# Altium PCB Navigation and Locomotion Shield.PcbDoc
Units mil, origin at the board's own origin, x right, y up, seen from the top; angles counter-clockwise.
Board outline 4500 x 2100 mil, 4 copper layers (Top Layer, Ground Plane, Power Plane, Bottom Layer); 38 components, 59 nets, 195 pads, 33 vias.
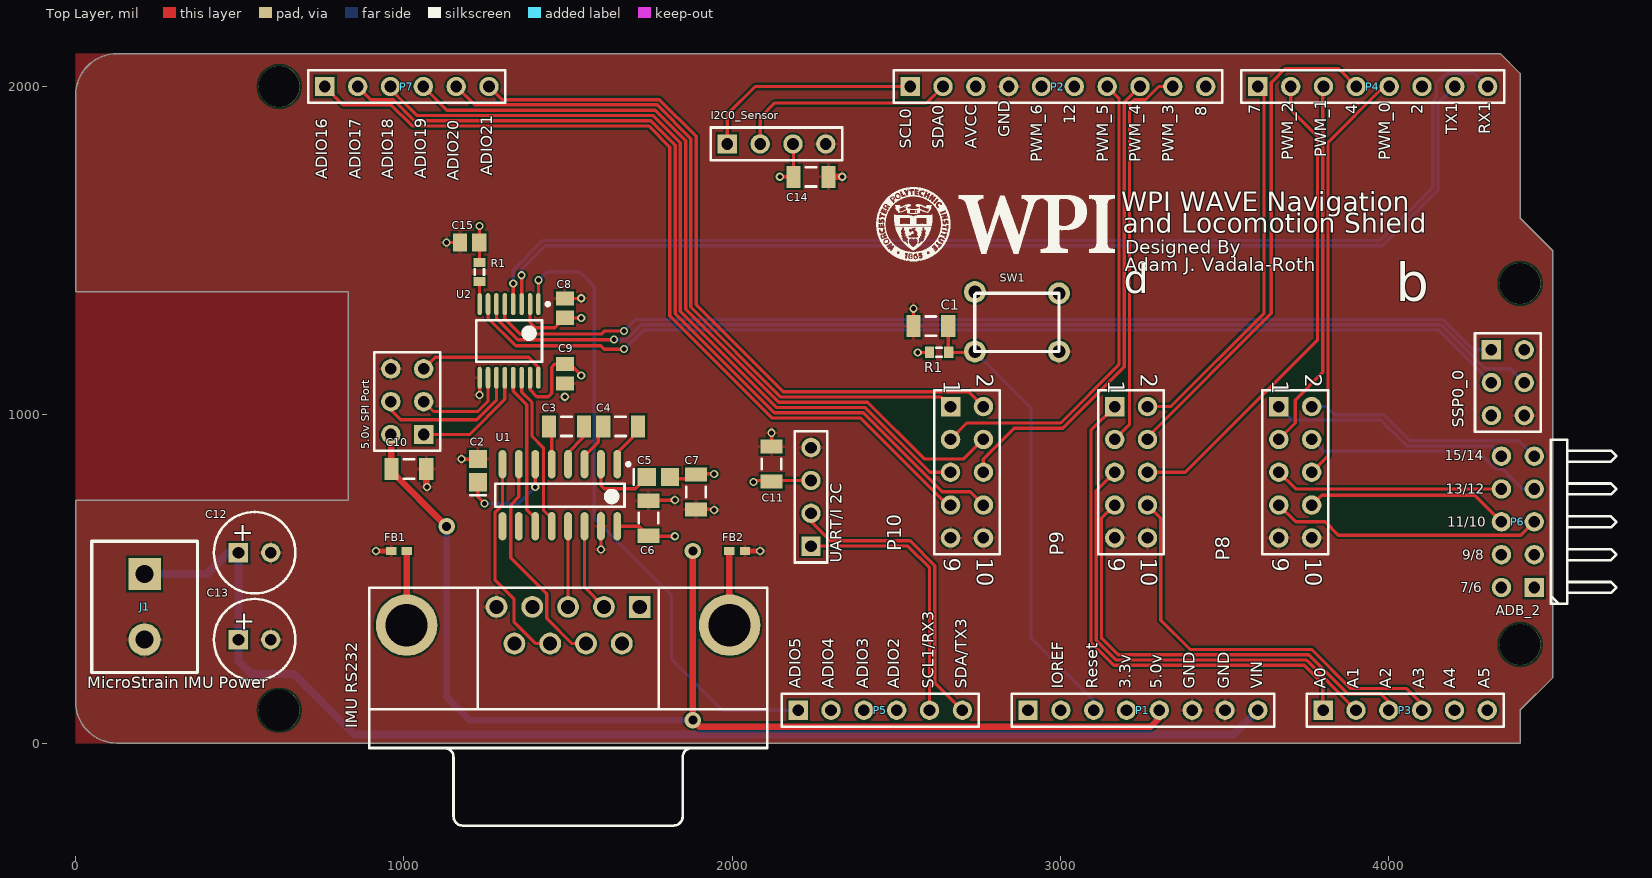
[diagram p0: Top Layer view]
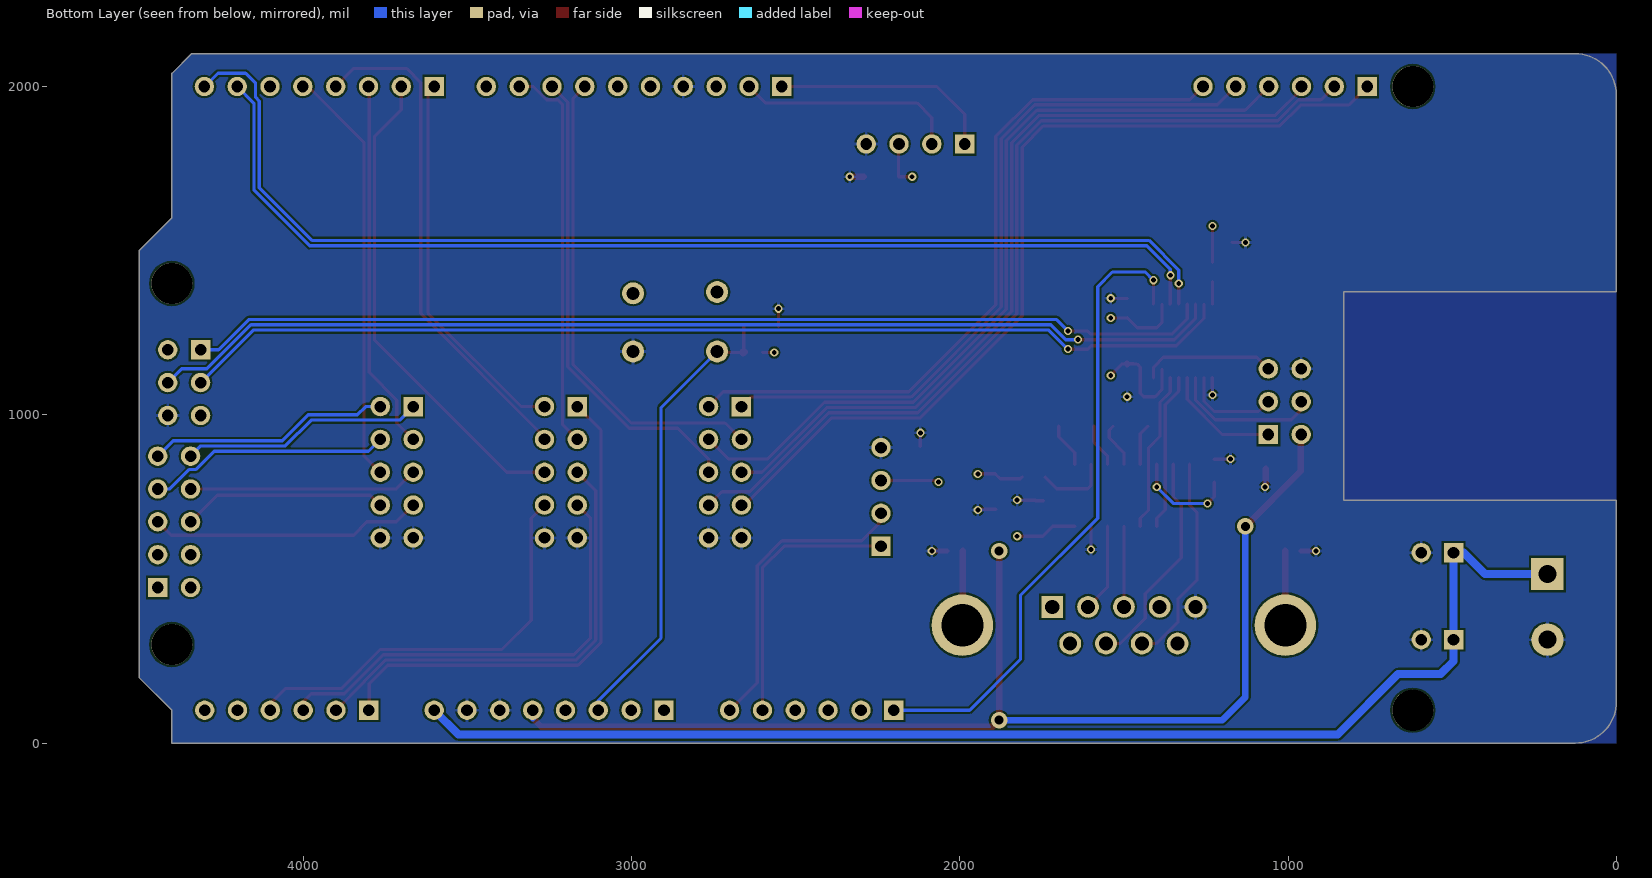
[diagram p1: Bottom Layer view, seen from below]
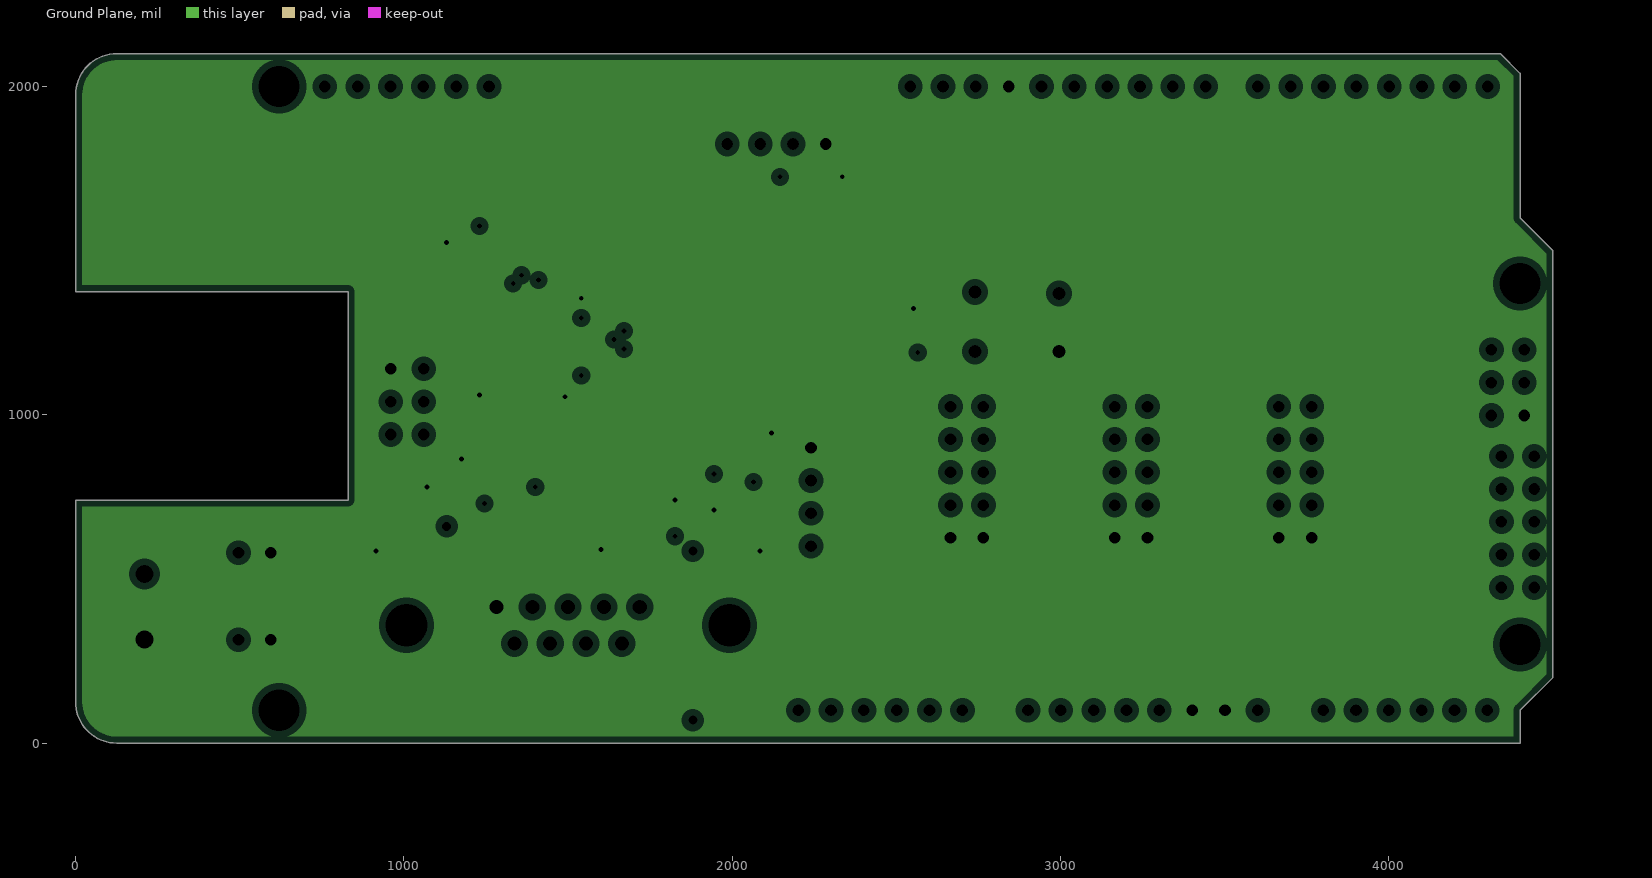
[diagram p2: Ground Plane, clearances drawn from the general rule]
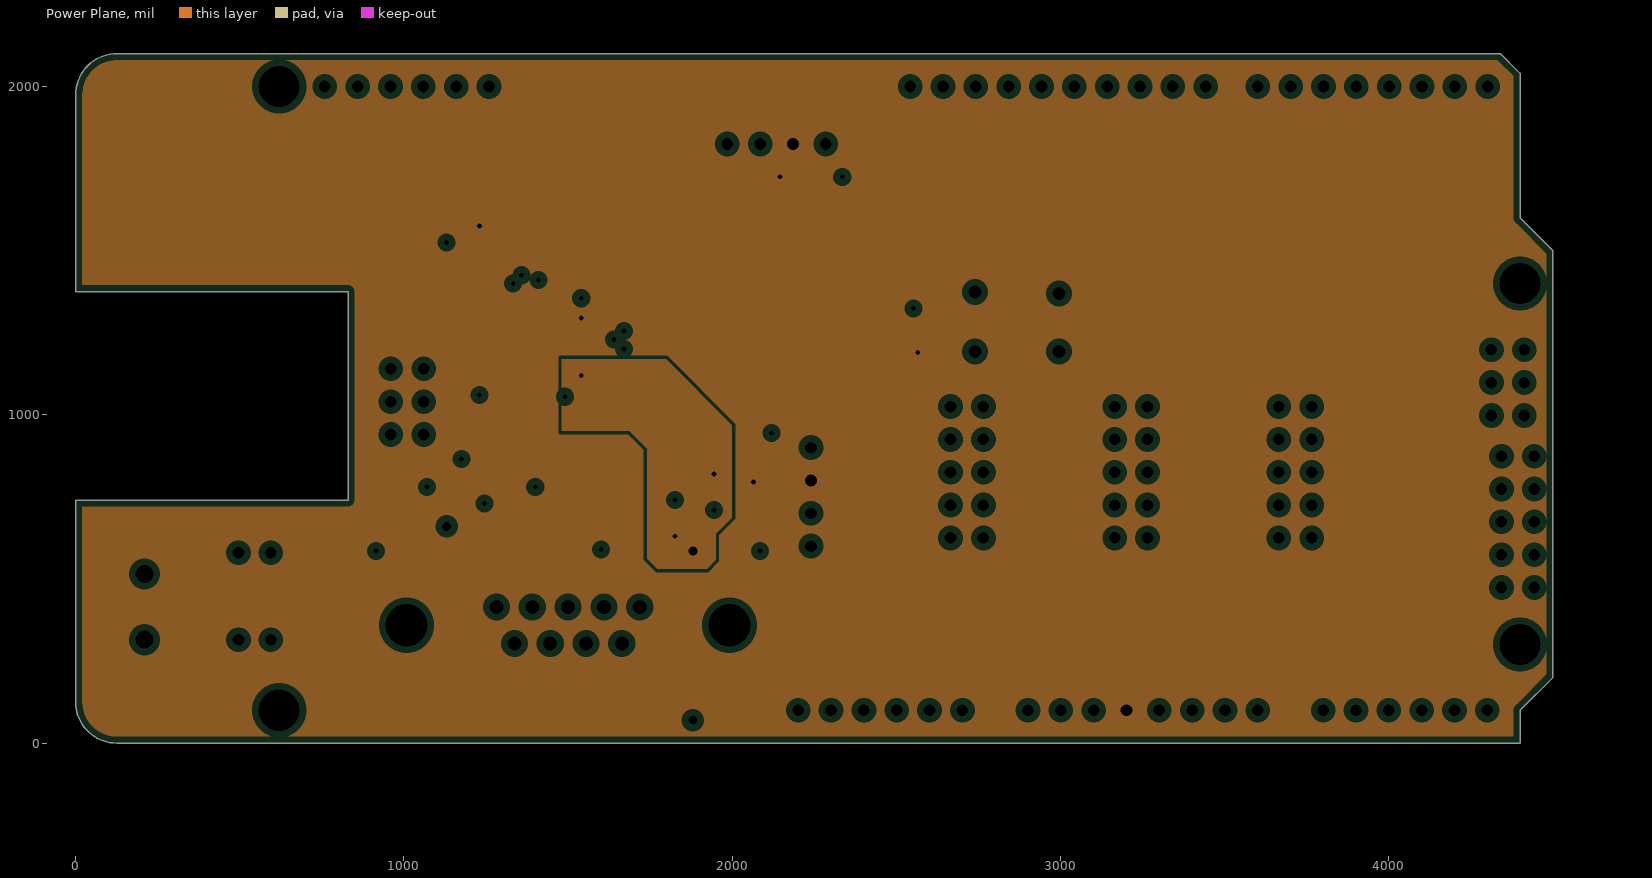
[diagram p3: Power Plane, clearances drawn from the general rule]

## Layer stack, top to bottom
Top Layer: signal copper 1.4
Dielectric: core 12.6, FR-4, Dk 4.8
Ground Plane: plane copper 1.4, net GND
Dielectric: prepreg 12.6, FR-4, Dk 4.8
Power Plane: plane copper 1.4, net (Multiple Nets)
Dielectric: core 12.6, FR-4, Dk 4.8
Bottom Layer: signal copper 1.4

## Board outline
125,0 cw(c125,125) 0,125 0,740 830,740 830,1375 0,1375 0,1975 cw(c125,1975) 125,2100 4340,2100 4400,2040 4400,1600 4500,1500 4500,200 4400,100 4400,0

## Design rules (kind name [scope] priority, off if disabled: settings)
Clearance [All] p1: gap=6
ComponentClearance [All] p1: gap=6 collisioncheckmode=3 verticalgap=2000 showdistances=TRUE
Height [All] p1: minheight=0 maxheight=2000 prefheight=500
PlaneClearance [All] p1: clearance=20
PlaneConnect PlaneConnect_3 [(InNet('VCC_3.3V') AND InComponent('I2C0_Sensor'))] p1: planeconnectstyle=NoConnect reliefexpansion=20 reliefentries=2 reliefconductorwidth=10 reliefairgap=10
PlaneConnect PlaneConnect_2 [(InNet('VCC_5V') AND InComponent('5.0v SPI Port'))] p2: planeconnectstyle=NoConnect reliefexpansion=20 reliefentries=4 reliefconductorwidth=10 reliefairgap=10
PlaneConnect PlaneConnect_1 [(InNet('VCC_3.3V') AND InComponent('UART/I 2C'))] p3: planeconnectstyle=NoConnect reliefexpansion=20 reliefentries=4 reliefconductorwidth=10 reliefairgap=10
PlaneConnect [All] p4: planeconnectstyle=Relief reliefexpansion=20 reliefentries=4 reliefconductorwidth=10 reliefairgap=10
PolygonConnect [All] p1: connectstyle=Relief reliefconductorwidth=10 reliefentries=4 polygonreliefangle="90 Angle"
RoutingVias [All] p1: holewidth=28 width=50 viastyle="Through Hole" minholewidth=28 minwidth=50 maxholewidth=28 maxwidth=50
SilkscreenOverComponentPads [All] p1: minsilkscreentomaskgap=10
SolderMaskExpansion [All] p1: expansion=4
Width [All] p1: maxlimit=25 minlimit=10 preferedwidth=10
23 further rules are at their usual default settings.

## Components (designator, comment, footprint, x,y, rotation, side; value= is the part's Value field where it differs from the comment)
"5.0v SPI Port" "SSP0 Header" "SSP0 Header" 1060,940 r180 top
C1 "Cap Semi" C1206 2605,1270 r0 top
C2 "Cap Semi" C2512 1225,830 r90 top
C3 "Cap Semi" C1206 1495,965 r0 top
C4 "Cap Semi" C1206 1660,965 r0 top
C5 "Cap Semi" C2512 1775,810 r0 top
C6 "Cap Semi" C1206 1745,685 r270 top
C7 "Cap Semi" C1206 1890,765 r90 top
C8 "Cap Pol3" C0805 1490,1325 r90 top
C9 "Cap Pol3" C0805 1490,1125 r270 top
C10 "Cap Semi" C1206 1015,835 r0 top
C11 "Cap Semi" C1206 2120,850 r90 top
C12 "Cap Pol1" CAPPR2.5-6.3x5/H.9 545,580 r0 top
C13 "Cap Pol1" CAPPR2.5-6.3x5/H.9 545,315 r0 top
C14 "Cap Semi" C1206 2240,1725 r0 top
C15 "Cap Pol3" C0805 1200,1525 r180 top
FB1 "BLM15HG601SN1D" BLM18PG121SN1D 985,585 r180 top
FB2 "BLM15HG601SN1D" BLM18PG121SN1D 2015,585 r0 top
I2C0_Sensor "Header 4" HDR1X4 1985,1825 r0 top
"IMU RS232" "D Connector 9" DSUB1.385-2H9 1500,-15 r180 top
J1 "Molex   0398890042" PCBComponent_1 210,515 r270 top
P1 "Arduino Leonardo Power Header" "Arduino Leonardo Power Header" 2901,100 r0 top locked
P2 "Arduino Leonardo AVCC Header" "Arduino Leonardo AVCC Header" 2542,2000 r0 top locked
P3 "Arduino Leonardo Analog Header" "Arduino Leonardo Analog Header" 4300,100 r0 top
P4 "Arduino Leonardo RXTX Header" "Arduino Leonardo RXTX PWM Header" 4301,2000 r0 top locked
P5 "AHD Additional IO 1 I2C0 U3 Header" "AHD Additional IO 1 I2C1 U3" 2701,100 r0 top locked
P6 "AHD Additional IO 2" "AHD Additional IO 2 front Digital Header" 4443,474 r0 top locked
P7 "AHD Additoinal IO 3" "AHD Additional IO 3 Header" 1259,2000 r0 top locked
P8 "Thruster Board Driver Pair Header" "Thruster Board Drvier Pair Header" 3665,1025 r270 top locked
P9 "Thruster Board Driver Pair Header" "Thruster Board Drvier Pair Header" 3165,1025 r270 top locked
P10 "Thruster Board Driver Pair Header" "Thruster Board Drvier Pair Header" 2665,1025 r270 top locked
R1 "Res3" J1-0603 2630,1190 r180 top
R1 "Res3" J1-0603 1230,1435 r90 top
SSP0_0 "SSP0 Header" "SSP0 Header" 4312.55,1198 r0 top
SW1 "MINI-MTRY-SWTCH" "Momentary Switch" 2995,1370 r180 top
U1 "MAX220CSE+" MAX220CES+ 1475,755 r270 top
U2 "SCES709A" SCES709a 1320,1225 r270 top
"UART/I 2C" "Header 4" HDR1X4 2240,600 r90 top

## Footprints (in the part's own frame and the unit in brackets; to place one, negate y for a bottom-side part, rotate by r counter-clockwise, add the part's x,y. Pads: shape width x height; smd on the part's side, far side on the other; paste and mask are expansions set on the pad)
"AHD Additional IO 1 I2C1 U3" [mm] "Connector; Header; 6 Position"
  rect 1.5x1.5 hole 0.9: 1(-12.7,0)
  round 1.5 hole 0.9: 2(-10.16,0) 3(-7.62,0) 4(-5.08,0) 5(-2.54,0) 6(0,0)
  silkscreen extent -13.97,-1.27 1.27,1.27
"AHD Additional IO 2 front Digital Header" [mm] "Connector; Header; 5x2 Position; Right Angle"
  rect 1.5x1.5 hole 0.9: 1(0,0)
  round 1.5 hole 0.9: 2(-2.54,0) 3(0,2.54) 4(-2.54,2.54) 5(0,5.08) 6(-2.54,5.08) 7(0,7.62) 8(-2.54,7.62) 9(0,10.16) 10(-2.54,10.16)
  silkscreen extent 1.27,-1.27 6.35,11.43
"AHD Additional IO 3 Header" [mm] "Connector; Header; 6 Position"
  rect 1.5x1.5 hole 0.9: 1(-12.7,0)
  round 1.5 hole 0.9: 2(-10.16,0) 3(-7.62,0) 4(-5.08,0) 5(-2.54,0) 6(0,0)
  silkscreen extent -13.97,-1.27 1.27,1.27
"Arduino Leonardo Analog Header" [mm] "Connector; Header; 6 Position"
  rect 1.5x1.5 hole 0.9: 1(-12.7,0)
  round 1.5 hole 0.9: 2(-10.16,0) 3(-7.62,0) 4(-5.08,0) 5(-2.54,0) 6(0,0)
  silkscreen extent -13.97,-1.27 1.27,1.27
"Arduino Leonardo AVCC Header" [mm]
  rect 1.5x1.5 hole 0.9: 1(0,0)
  round 1.5 hole 0.9: 2(2.54,0) 3(5.08,0) 4(7.62,0) 5(10.16,0) 6(12.7,0) 7(15.24,0) 8(17.78,0) 9(20.32,0) 10(22.86,0)
  silkscreen extent -1.27,-1.27 24.13,1.27
"Arduino Leonardo Power Header" [mm] "Connector; Header; 8 Position"
  rect 1.5x1.5 hole 0.9: 1(0,0)
  round 1.5 hole 0.9: 2(2.54,0) 3(5.08,0) 4(7.62,0) 5(10.16,0) 6(12.7,0) 7(15.24,0) 8(17.78,0)
  silkscreen extent -1.27,-1.27 19.05,1.27
"Arduino Leonardo RXTX PWM Header" [mm] "Arduino Leonardo Header"
  rect 1.5x1.5 hole 0.9: 1(-17.78,0)
  round 1.5 hole 0.9: 2(-15.24,0) 3(-12.7,0) 4(-10.16,0) 5(-7.62,0) 6(-5.08,0) 7(-2.54,0) 8(0,0)
  silkscreen extent -19.05,-1.27 1.27,1.27
BLM18PG121SN1D [mm] "Chip Inductor, 2-Leads, Body 1.0x0.5mm, IPC Medium Density"
  rect 0.8x0.6 smd: 1(-0.6,0) 2(0.6,0)
  body extent -0.52,-0.28 0.53,0.27, height 0.6
C0805 [mm] "Chip Capacitor, Body 2.0x1.3mm, IPC High Density"
  rect 1.1x1.4 smd: 1(-0.75,0) 2(0.75,0)
  body extent -1.1,-0.72 1.1,0.72, height 1.4
C1206 [mm] "Chip Capacitor, Body 3.2x1.6mm, IPC High Density"
  rect 1.1x1.7 smd: 1(-1.35,0) 2(1.35,0)
  silkscreen extent -0.4,-0.75 0.4,0.75, body extent -1.7,-0.9 1.7,0.9, height 1.3
C2512 [mm] "Chip Capacitor, Body 2.54x1.27mm, IPC High Density"
  rect 1.4x1.4 smd: 1(-0.9,0) 2(0.9,0)
  silkscreen extent -1.9,-0.6 -1.9,0.6, body extent -1.45,-0.82 1.45,0.82, height 1.3
CAPPR2.5-6.3x5/H.9 [mm] "Capacitor, Electrolytic, Radial; Body 6.3 x 5 mm (Dia.xH typ); Pin Spacing 2.5 mm (typ)"
  rect 1.5x1.5 hole 0.9: 1(-1.25,0)
  round 1.5 hole 0.9: 2(1.25,0)
  silkscreen extent -3.15,-3.15 3.15,3.15
DSUB1.385-2H9 [mm] "Connector; D Subminiature; 9 Position; Right Angle; Pitch 1.385 mm"
  rect 1.69x1.69 hole 1.09: 1(-5.54,-10.92)
  round 1.69 hole 1.09: 2(-2.77,-10.92) 3(0,-10.92) 4(2.77,-10.92) 5(5.54,-10.92) 6(-4.155,-8.08) 7(-1.385,-8.08) 8(1.385,-8.08) 9(4.155,-8.08)
  round 4.76 hole 3.26: 10(-12.495,-9.5) 11(12.495,-9.5)
  silkscreen extent -15.4,-12.4 15.4,6
HDR1X4 [mm] "Connector; Header; 4 Position"
  rect 1.5x1.5 hole 0.9: 1(0,0)
  round 1.5 hole 0.9: 2(2.54,0) 3(5.08,0) 4(7.62,0)
  silkscreen extent -1.27,-1.27 8.89,1.27
J1-0603 [mm] "Chip Resistor, Body 1.6x0.8mm, IPC High Density"
  rect 0.7x0.9 smd: 1(-0.75,0) 2(0.75,0)
  silkscreen extent -0.2,-0.35 0.2,0.35, body extent -0.85,-0.48 0.85,0.48, height 0.9
MAX220CES+ [mm] "MAX220 RS232 Converter"
  oval 2.2x0.6 smd: 1(-2.4,4.445) 2(-2.4,3.175) 3(-2.4,1.905) 4(-2.4,0.635) 5(-2.4,-0.635) 6(-2.4,-1.905) 7(-2.4,-3.175) 8(-2.4,-4.445) 9(2.4,-4.445) 10(2.4,-3.175) 11(2.4,-1.905) 12(2.4,-0.635) 13(2.4,0.635) 14(2.4,1.905) 15(2.4,3.175) 16(2.4,4.445)
  silkscreen extent -2.52,-5 0.9,5.42, body extent -2,-5 2,5, height 1.75
"Momentary Switch" [mm] "Momentary switch for reset"
  round 1.7 hole 1: 1(6.5,-0.1) 2(0,0) 3(6.5,4.5) 4(0,4.5)
  silkscreen extent 0,0 6.5,4.5
PCBComponent_1 [mm]
  rect 2.5x2.5 hole 1.4: 1(0,0)
  round 2.5 hole 1.4: 2(5.08,0)
  silkscreen extent -2.54,-4.1 7.62,4.1
SCES709a [mm] "TSOP, 16-Leads, Body 5.1x4.5mm (max), Pitch 0.65mm, IPC Medium Density"
  oval 1.7x0.35 smd: 1(-2.85,2.275) 2(-2.85,1.625) 3(-2.85,0.975) 4(-2.85,0.325) 5(-2.85,-0.325) 6(-2.85,-0.975) 7(-2.85,-1.625) 8(-2.85,-2.275) 9(2.85,-2.275) 10(2.85,-1.625) 11(2.85,-0.975) 12(2.85,-0.325) 13(2.85,0.325) 14(2.85,0.975) 15(2.85,1.625) 16(2.85,2.275)
  silkscreen extent -2.97,-2.55 1.6,3.13, body extent -2.25,-2.55 2.25,2.55, height 1.2
"SSP0 Header" [mm] "SSP0 is ARM's SPI variant, fully implements SPI SSI and adds new features"
  rect 1.5x1.5 hole 0.9: 1(0,0)
  round 1.5 hole 0.9: 2(2.54,0) 3(0,-2.54) 4(2.54,-2.54) 5(0,-5.08) 6(2.54,-5.08)
  silkscreen extent -1.27,-6.35 3.81,1.27
"Thruster Board Drvier Pair Header" [mm] "Connector; Header; 5x2 Position"
  rect 1.5x1.5 hole 0.9: 1(0,0)
  round 1.5 hole 0.9: 2(0,2.54) 3(2.54,0) 4(2.54,2.54) 5(5.08,0) 6(5.08,2.54) 7(7.62,0) 8(7.62,2.54) 9(10.16,0) 10(10.16,2.54)
  silkscreen extent -1.27,-1.27 11.43,3.81

## Part data
C1 C2 C3 C4 C5 C6 C7 C10 C11 C14: "Capacitor (Semiconductor SIM Model)"
C8 C9 C15: "Polarized Capacitor (Surface Mount)"
C12 C13: "Polarized Capacitor (Radial)"
I2C0_Sensor "UART/I 2C": "Header, 4-Pin"
"IMU RS232": "Receptacle Assembly, 9 Position, Right Angle"
J1: library part "Molex   0398890042 Screw Terminal", "Screw Terminal"
P2: "Arduino Leonardo AREF Header"
R1 R1: "Resistor"
SW1: library part "Mini Momemtary Switch"
U1: "Maxim Integrated RS232 shifter IC"

## Free pads (board coordinates)
  round 125 hole 125: ""(620,100) ""(620,2000) ""(4400,300) ""(4400,1400)

## Via types
v1: diameter 25, hole 15, Top Layer to Bottom Layer, 30 vias
v2: diameter 50, hole 28, Top Layer to Bottom Layer, 3 vias

## Nets (pads, with @x,y where several pads share a name; then routed paths per layer and width w, separated by ;. In a path a pad name is that pad's centre, name@x,y a point inside that pad or via, vN(x,y) a via of type N, cw(c..) or ccw(c..) an arc to the next point about the centre after c; other vN are vias at no path point)
5V_CS: "5.0v SPI Port.5" U2.16 | length 408.9
  Top Layer w10: 1060,1140 1095,1175 1380,1175 1409.57,1145.43 U2.16
GND: "5.0v SPI Port.6" "IMU RS232.5" "UART/I 2C.4" C1.1 C2.2 C6.1 C7.1 C8.2 C9.2 C10.2 C11.2 C12.2 C13.2 C14.2 C15.2 FB1.2 FB2.2 I2C0_Sensor.4 J1.2 P1.6 P1.7 P2.4 P8.9 P8.10 P9.9 P9.10 P10.9 P10.10 SSP0_0.6 SW1.4 U1.15 U2.9 | length 686.2
  Top Layer w10: v1(1130,1525) C15.2 ; v1(1175,865) 1224.57,865 C2.2 ; v1(1230,1060) 1230.43,1060.43 U2.9 ; C8.2 1539.53,1354.53 v1(1540,1355) ; v1(1600,590) U1.15 ; C6.1 1768.15,738.15 1770,740 v1(1825,740) ; C7.1 1943.15,711.85 v1(1945,710) ; C11.2 v1(2120,945) ; C1.1 v1(2551.85,1323.15)
  Top Layer w15: v1(915,585) FB1.2 ; FB2.2 v1(2085,585)
  Top Layer w20: C10.2 1068.15,781.85 v1(1070,780) ; C14.2 v1(2335,1725)
  other v1: 1490,1055
MISO: SSP0_0.1 U2.5 | length 3125.5
  Top Layer w10: U2.5 1307.2,1292.8 1354,1246 1601,1246 1610,1255 v1(1670,1255)
  Bottom Layer w10: v1(1670,1255) 1705,1290 4165.8,1290 4257.8,1198 SSP0_0.1
MISO_5V: "5.0v SPI Port.1" U2.12 | length 357.2
  Top Layer w10: 1060,940 1200,940 1307.2,1047.2 U2.12
MOSI: SSP0_0.4 U2.6 | length 3293
  Top Layer w10: U2.6 1281.61,1293.39 1346,1229 v1(1640,1229)
  Bottom Layer w10: v1(1640,1229) 1677.23,1229 1722.23,1274 4159.18,1274 4293.18,1140 4370.55,1140 SSP0_0.4
MOSI_5V: "5.0v SPI Port.4" U2.11 | length 452.1
  Top Layer w10: 960,1040 960,1015 990,985 1222.37,985 1281.61,1044.24 U2.11
NetC2_1: C2.1 U1.6 | length 318.1
  Top Layer w10: C2.1 1225,750 v1(1245,730) ; v1(1400,780) U1.6
  Bottom Layer w10: v1(1245,730) 1350,730 v1(1400,780)
NetC3_1: C3.1 U1.5 | length 125.1
  Top Layer w10: C3.1@1426.85,965 1450,941.85 U1.5
NetC3_2: C3.2 U1.4 | length 139.1
  Top Layer w10: U1.4 1500,885 1545,930 1545,953.15 C3.2@1533.15,965
NetC4_1: C4.1 U1.3 | length 132.8
  Top Layer w10: U1.3 1550,875 1591.85,916.85 C4.1@1591.85,965
NetC4_2: C4.2 U1.1 | length 135.5
  Top Layer w10: U1.1 1650,885 1698.15,933.15 C4.2@1698.15,965
NetC5_1: C5.1 U1.2 | length 222.7
  Top Layer w10: U1.2 1600,785 1610,775 1704.57,775 C5.1
NetFB1_1: "IMU RS232.11" FB1.1 | length 226.2
  Top Layer w10: 1008.07,359.02 1008.62,359.57
  Top Layer w20: 1008.62,359.57 FB1.1
NetFB2_1: "IMU RS232.10" FB2.1 | length 226.2
  Top Layer w10: 1991.38,359.57 1991.93,359.02
  Top Layer w20: 1991.38,359.57 FB2.1
"NetIMU RS232_2": "IMU RS232.2" U1.14 | length 270.1
  Top Layer w10: U1.14 1550,473.98 1609.06,414.92
"NetIMU RS232_3": "IMU RS232.3" U1.13 | length 245.6
  Top Layer w10: 1500,414.92 U1.13
"NetIMU RS232_7": "IMU RS232.7" U1.7 | length 676.8
  Top Layer w10: U1.7 1350,750 1325,725 1325,565 1435.21,454.79 1435.21,379.79 1511.89,303.11 1554.53,303.11
"NetIMU RS232_8": "IMU RS232.8" U1.8 | length 651.1
  Top Layer w10: U1.8 1300,724.27 1277.19,701.46 1277.19,497.81 1335,440 1335,370 1401.89,303.11 1445.47,303.11
NetR1_1: R1.1@1230,1405.47 U2.8 | length 68.4
  Top Layer w10: R1.1@1230,1405.47 1230,1337.64 U2.8
P1_M1ENA/B: P6.7 P8.4 | length 740.5
  Bottom Layer w10: P8.4 3801,889 4270.69,889 4326.21,833.47 4346.53,833.47 4406,774 P6.7
P1_M1INA: P6.9 P8.2 | length 740.5
  Bottom Layer w10: P8.2 3810,1025 3835,1000 3985,1000 4064,921 4396,921 P6.9
P1_M1INB: P6.6 P8.8 | length 624
  Top Layer w10: P8.8 3795,755 4262,755 P6.6
P1_M2ENA/B: P6.8 P8.5 | length 699.1
  Top Layer w10: P8.5 3716,774 P6.8
P1_M2INA: P6.5 P8.7 | length 832.7
  Top Layer w10: P8.7 3716,674 3806,674 3846.53,633.47 4402.47,633.47 P6.5
P1_M2INB: P6.10 P8.1 | length 740.5
  Bottom Layer w10: P8.1 3706,984 3976,984 4055,905 4312,905 P6.10
P2_M1ENA/B: P3.2 P9.5 | length 1416
  Top Layer w10: P9.5 3108.47,768.47 3108.47,313.9 3169.37,253 3749.37,253 3815,187.37 3815,185 P3.2
P2_M1INA: P3.3 P9.7 | length 1391.7
  Top Layer w10: P9.7 3124.47,684.47 3124.47,320.53 3176,269 3756,269 3875,150 3975,150 P3.3@4009.87,115.13
P2_M1INB: P3.1 P9.1 | length 1587.9
  Top Layer w10: P9.1 3092.47,952.47 3092.47,307.27 3162.75,237 3742.75,237 3799,180.75 3799,101 P3.1
P2_M2ENA/B: P4.4 P9.4 | length 1542.8
  Top Layer w10: P9.4 3265,932.37 3641.53,1308.9 3641.53,2011.53 3685,2055 3846,2055 P4.4
P2_M2INA: P4.1 P9.2 | length 1170.9
  Top Layer w10: P9.2 3335,1025 3620,1310 3620,1981 P4.1
P2_M2INB: P3.4 P9.8 | length 1306.1
  Top Layer w10: P9.8@3265,743.94 P9.8 3305.53,684.47 3305.53,374.47 3395,285 3765,285 3884,166 4054,166 4100,120 P3.4
P3_M1ENA/B: P7.3 P10.5 | length 2498.4
  Top Layer w10: P7.3 959,1991.25 1038.25,1912 1758.25,1912 1842,1828.25 1842,1315.12 2135.12,1022 2405.37,1022 2602.37,825 P10.5
P3_M1INA: P7.1 P10.7 | length 2734.7
  Top Layer w10: P7.1 815.53,1943.47 961.53,1943.47 1025,1880 1745,1880 1810,1815 1810,1301.86 2121.86,990 2392.12,990 2657.12,725 P10.7
P3_M1INB: P7.5 P10.1 | length 2210.4
  Top Layer w10: P7.5 1215,1944 1335,1944 1771.51,1944 1874,1841.51 1874,1328.37 2148.37,1054 2636,1054 P10.1
P3_M2ENA/B: P7.4 P10.4 | length 2501.1
  Top Layer w10: P7.4 1131,1928 1344.88,1928 1764.88,1928 1858,1834.88 1858,1321.75 2141.75,1038 2412,1038 2584.47,865.53 2705.53,865.53 P10.4
P3_M2INA: P7.6 P10.2 | length 2210.4
  Top Layer w10: P7.6 1299,1960 1340,1960 1778.14,1960 1890,1848.14 1890,1335 2155,1070 2720,1070 P10.2
P3_M2INB: P7.2 P10.8 | length 2734.7
  Top Layer w10: P7.2 899.53,1959.47 968.16,1959.47 1031.63,1896 1751.63,1896 1826,1821.63 1826,1308.49 2128.49,1006 2398.75,1006 2639.22,765.53 2724.47,765.53 P10.8
PWM_1: P4.5 P8.6 | length 1266.1
  Top Layer w10: P8.6 3815,875 3815,1830 P4.5@3985,2000
PWM_2: P4.3 P8.3 | length 1131.3
  Top Layer w10: P8.3 3715,975 3715,1045 3799,1129 3799,1998 P4.3
PWM_3: P4.2 P9.6 | length 1490.9
  Top Layer w10: P9.6 3380,825 3783,1228 3783,1847 3701,1929 P4.2
PWM_4: P2.9 P9.3 | length 1193.4
  Top Layer w10: P9.3 3210,970 3210,1945 3224.47,1959.47 3258.79,1959.47 3299.31,2000 P2.9
PWM_5: P2.8 P10.6 | length 1459.1
  Top Layer w10: P10.6 2765,865 2859,959 3006.63,959 3194,1146.37 3194,1952 P2.8
PWM_6: P2.7 P10.3 | length 1469.4
  Top Layer w10: P10.3 2715,975 3000,975 3178,1153 3178,1964 P2.7
PWM_7: P2.5
RESET: C1.2 P1.3 R1.1@2659.53,1190 SW1.3 | length 1404.1
  Top Layer w10: R1.1@2658.15,1191.38 C1.2 ; R1.1@2659.53,1190 SW1.3@2736.26,1190
  Top Layer w25: R1.1@2658.15,1191.38 R1.1@2659.53,1190 ; SW1.3@2736.26,1190 SW1.3
  Bottom Layer w10: SW1.3 2910,1021.93 2910,320 3101,129 P1.3
SCK: SSP0_0.3 U2.7 | length 3229
  Top Layer w10: U2.7 1256.02,1293.98 1340,1210 1600,1210 1610,1200 v1(1670,1200)
  Bottom Layer w10: v1(1670,1200) 1670.86,1200 1728.86,1258 4152.55,1258 SSP0_0.3
SCK_5V: "5.0v SPI Port.3" U2.10 | length 292.9
  Top Layer w10: 1060,1040 1090,1010 1224.75,1010 1256.02,1041.28 U2.10
SCL_1: I2C0_Sensor.1 P2.1 | length 682.2
  Top Layer w10: I2C0_Sensor.1 1985,1915 2070,2000 P2.1
SDA_1: I2C0_Sensor.2 P2.2 | length 676.4
  Top Layer w10: I2C0_Sensor.2 2085,1905 2130,1950 2592,1950 P2.2
SSP0_5.0_CS: P5.1 U2.1 | length 1954.5
  Top Layer w10: U2.1 1410,1337.64 v1(1410,1410)
  Bottom Layer w10: v1(1410,1410) 1435,1435 1535,1435 1580,1390 1580,685 1815,450 1815,255 1970,100 P5.1
U0_RX: P4.8 U2.4 | length 3522.9
  Top Layer w10: U2.4 v1(1332.8,1400)
  Bottom Layer w10: v1(1332.8,1400) 1332.8,1440.42 1423.37,1531 3973.37,1531 4134,1691.63 4134,1955.63 4145,1966.63 4145,2010 4175.53,2040.53 4259.47,2040.53 P4.8@4305,1995
U0_RX_5V: U1.12 U2.14 | length 490.2
  Top Layer w10: U2.14 1358.39,1069.24 1390,1037.63 1390,935 1425,900 1425,710 1450,685 U1.12
U0_TX: P4.7 U2.3 | length 3334.7
  Top Layer w10: v1(1358.39,1425) 1358.39,1338.82 U2.3@1360,1337.2
  Bottom Layer w10: v1(1358.39,1425) 1358.39,1443.39 1430,1515 3980,1515 4150,1685 4150,1949 P4.7
U0_TX_5V: U1.11 U2.13 | length 480.1
  Top Layer w10: U2.13 1332.8,1072.2 1374,1031 1374,711 1400,685 U1.11
U3_RX: "UART/I 2C.2" P5.6 | length 933.3
  Top Layer w10: 2240,700 2240,674.61 2298.61,616 2541.63,616 2617,540.63 2617,184 P5.6
U3_TX: "UART/I 2C.1" P5.5 | length 822.3
  Top Layer w10: 2240,600 2535,600 2601,534 P5.5
VCC_3.3V: "UART/I 2C.3" C8.1 C11.1 C14.1 C15.1 I2C0_Sensor.3 P1.4 R1.2 U2.2 | length 697.3
  Top Layer w10: R1.2@1230,1464.53 v1(1230,1575) ; U2.2 1383.98,1281.02 1400,1265 1459.53,1265 C8.1 1490.47,1295 v1(1540,1295) ; v1(2065,795) 2070,800 2240,800 ; v1(2145,1725) C14.1 2186.85,1823.15 I2C0_Sensor.3 ; v1(2565,1190) R1.2@2600.47,1190
VCC_5V: "5.0v SPI Port.2" C5.2 C6.2 C7.2 C9.1 C10.1 P1.5 U1.16 U2.15 | length 4307.3
  Top Layer w10: U2.15@1383.98,1139.08 U2.15 1383.98,1076.02 1405,1055 1440,1055 1450,1065 1450,1145 1460,1155 C9.1@1474.53,1155 ; C9.1@1475,1154.53 C9.1@1474.53,1155 ; C9.1@1490.47,1155 1505,1155 v1(1540,1120) ; U1.16 1716.34,660.51 1746.85,630 v1(1825,630) ; C5.2@1810,810.43 C5.2 1815.43,805 1876.85,805 C7.2 1891.85,820 v1(1945,820) ; C9.1@1474.53,1155 1489.53,1155 C9.1 1472.27,1157.26 C9.1@1474.53,1155
  Top Layer w20: 960,940 961.85,938.15 C10.1 961.85,828.15 v2(1130,660) ; C9.1 C9.1@1490.47,1155 ; v2(1880,585) v2(1880,70) 1900,50 3275,50 P1.5@3301,76
  Bottom Layer w20: v2@1130,655 1130,140 1200,70 v2(1880,70) ; P1.5@3301,76 P1.5
VIN: C12.1 C13.1 J1.1 P1.8 | length 3871.4
  Bottom Layer w25: J1.1 400,515 465,580 C12.1 C13.1 495.79,249.21 535,210 665,210 848.5,26.5 3527.5,26.5 P1.8
pads on no net: "IMU RS232.1" "IMU RS232.4" "IMU RS232.6" "IMU RS232.9" P1.1 P1.2 P2.3 P2.6 P2.10 P3.5 P3.6 P4.6 P5.2 P5.3 P5.4 P6.1 P6.2 P6.3 P6.4 SSP0_0.2 SSP0_0.5 SW1.1 SW1.2 U1.9 U1.10

## Polygon pours and split planes (outlines as drawn)
GND on Bottom Layer "Power Plane-No Net" (solid, remove dead copper, pour order 3): 0,0 4400,0 4400,100 4425,125 4500,200 4500,270 4500,1500 4480,1520 4400,1600 4400,1625 4400,2040 4340,2100 4300,2100 0,2100 0,0
GND on Top Layer "Power Plane-No Net" (solid, remove dead copper, pour order 4): 0,0 4400,0 4400,100 4425,125 4500,200 4500,270 4500,1500 4480,1520 4400,1600 4400,1625 4400,2040 4340,2100 4300,2100 0,2100 0,0
GND on Ground Plane (split plane): 125,2079.9 4331.68,2079.9 4379.9,2031.68 4379.9,1600 4380.29,1596.08 4381.43,1592.31 4383.29,1588.83 4385.79,1585.79 4479.9,1491.68 4479.9,208.32 4385.79,114.21 4383.29,111.17 4381.43,107.69 4380.29,103.92 4379.9,100 4379.9,20.1 125,20.1 124.32,20.03 115.85,20.4 106.77,21.6 97.82,23.58 89.09,26.33 80.63,29.84 72.5,34.07 64.77,38.99 57.51,44.57 50.75,50.75 44.57,57.51 38.99,64.77 34.07,72.5 29.84,80.63 26.33,89.09 23.58,97.82 21.6,106.77 20.4,115.85 20.03,124.32 20.1,125 20.1,719.9 830,719.9 833.92,720.29 837.69,721.43 841.17,723.29 844.21,725.79 846.71,728.83 848.57,732.31 849.71,736.08 850.1,740 850.1,1375 849.71,1378.92 848.57,1382.69 846.71,1386.17 844.21,1389.21 841.17,1391.71 837.69,1393.57 833.92,1394.71 830,1395.1 20.1,1395.1 20.1,1975 20.03,1975.68 20.4,1984.15 21.6,1993.23 23.58,2002.18 26.33,2010.91 29.84,2019.37 34.07,2027.5 38.99,2035.23 44.57,2042.49 50.75,2049.25 57.51,2055.43 64.77,2061.01 72.5,2065.93 80.63,2070.16 89.09,2073.67 97.82,2076.42 106.77,2078.4 115.85,2079.6 124.32,2079.97
VCC_5V on Power Plane (split plane): 1999.9,967.89 1999.9,687.11 1951.4,638.6 1950.29,636.95 1949.9,635 1949.9,557.11 1922.89,530.1 1772.11,530.1 1740.1,562.11 1740.1,895 1739.71,896.95 1738.6,898.6 1688.6,948.6 1686.95,949.71 1685,950.1 1480.1,950.1 1480.1,1169.9 1797.89,1169.9
VCC_3.3V on Power Plane (split plane): 125,2079.9 4331.68,2079.9 4379.9,2031.68 4379.9,1600 4380.29,1596.08 4381.43,1592.31 4383.29,1588.83 4385.79,1585.79 4479.9,1491.68 4479.9,208.32 4385.79,114.21 4383.29,111.17 4381.43,107.69 4380.29,103.92 4379.9,100 4379.9,20.1 125,20.1 124.32,20.03 115.85,20.4 106.77,21.6 97.82,23.58 89.09,26.33 80.63,29.84 72.5,34.07 64.77,38.99 57.51,44.57 50.75,50.75 44.57,57.51 38.99,64.77 34.07,72.5 29.84,80.63 26.33,89.09 23.58,97.82 21.6,106.77 20.4,115.85 20.03,124.32 20.1,125 20.1,719.9 830,719.9 833.92,720.29 837.69,721.43 841.17,723.29 844.21,725.79 846.71,728.83 848.57,732.31 849.71,736.08 850.1,740 850.1,1375 849.71,1378.92 848.57,1382.69 846.71,1386.17 844.21,1389.21 841.17,1391.71 837.69,1393.57 833.92,1394.71 830,1395.1 20.1,1395.1 20.1,1975 20.03,1975.68 20.4,1984.15 21.6,1993.23 23.58,2002.18 26.33,2010.91 29.84,2019.37 34.07,2027.5 38.99,2035.23 44.57,2042.49 50.75,2049.25 57.51,2055.43 64.77,2061.01 72.5,2065.93 80.63,2070.16 89.09,2073.67 97.82,2076.42 106.77,2078.4 115.85,2079.6 124.32,2079.97

## Other copper
Power Plane (plane layer: these items are gaps in the copper):
  lines w10: 1475,945 1685,945 1735,895 1735,560 1770,525 1925,525 1955,555 1955,635 2005,685 2005,970 1800,1175 1475,1175 1475,945

## Silkscreen, mask and mechanical layers (free items; w line width, h text height)
Top Overlay:
  drawing of 16 lines, arcs and shapes, not listed
  text "WPI WAVE Navigation" at 3185,1599.83 h100
  text "and Locomotion Shield" at 3190,1535 h100
  text "Designed By" at 3197,1477 h70
  text "Adam J. Vadala-Roth" at 3195,1423 h70
  text "d" at 3192,1341 h150
  text "b" at 4021,1308 h200
  text "MicroStrain IMU Power" at 35,155 h60
Mechanical 15:
  circle w5: c4400,300 r62.5
  circle w5: c4400,1400 r62.5
  circle w5: c620,100 r62.5
  circle w5: c620,2000 r62.5
  lines w5: 0,125 ccw(c125,125) 125,0 4400,0 4400,100 4500,200 4500,1500 4400,1600 4400,2040 4340,2100 125,2100 ccw(c125,1975) 0,1975 0,125
  text "Cutout For Ethernet Connector" at 20,1230 h25

## Text inside footprints (layer, text, board x,y; h text height)
C12: Top Overlay "+" at 475,615 h59.06
C13: Top Overlay "+" at 480,345 h59.06
P1: Top Overlay "Reset" at 3126,165 h60 r90; Top Overlay "3.3v" at 3226,165 h60 r90; Top Overlay "5.0v" at 3321,165 h60 r90; Top Overlay "GND" at 3526,165 h60 r90; Top Overlay "GND" at 3421,165 h60 r90; Top Overlay "VIN" at 3626,165 h60 r90; Top Overlay "IOREF" at 3021,165 h60 r90
P2: Top Overlay "PWM_6" at 2957,1770 h60 r90; Top Overlay "SDA0" at 2657,1810 h60 r90; Top Overlay "SCL0" at 2557,1810 h60 r90; Top Overlay "8" at 3457,1910 h60 r90; Top Overlay "GND" at 2857,1845 h60 r90; Top Overlay "PWM_5" at 3157,1770 h60 r90; Top Overlay "PWM_4" at 3257,1770 h60 r90; Top Overlay "PWM_3" at 3357,1770 h60 r90; Top Overlay "12" at 3057,1885 h60 r90; Top Overlay "AVCC" at 2757,1810 h60 r90
P3: Top Overlay "A0" at 3820,165 h60 r90; Top Overlay "A1" at 3920,165 h60 r90; Top Overlay "A3" at 4120,165 h60 r90; Top Overlay "A2" at 4020,165 h60 r90; Top Overlay "A4" at 4215,165 h60 r90; Top Overlay "A5" at 4320,165 h60 r90
P4: Top Overlay "PWM_2" at 3721,1775 h60 r90; Top Overlay "PWM_1" at 3821,1785 h60 r90; Top Overlay "7" at 3621,1915 h60 r90; Top Overlay "4" at 3916,1915 h60 r90; Top Overlay "PWM_0" at 4016,1775 h60 r90; Top Overlay "2" at 4116,1915 h60 r90; Top Overlay "TX1" at 4221,1855 h60 r90; Top Overlay "RX1" at 4321,1855 h60 r90
P5: Top Overlay "SDA/TX3" at 2726,165 h60 r90; Top Overlay "SCL1/RX3" at 2626,165 h60 r90; Top Overlay "ADIO2" at 2521,165 h60 r90; Top Overlay "ADIO3" at 2426,165 h60 r90; Top Overlay "ADIO4" at 2321,165 h60 r90; Top Overlay "ADIO5" at 2221,165 h60 r90
P6: Top Overlay "7/6" at 4218,459 h30; Top Overlay "9/8" at 4223,559 h30; Top Overlay "11/10" at 4178,659 h30; Top Overlay "13/12" at 4173,759 h30; Top Overlay "15/14" at 4171,861 h30; Top Overlay "ADB_2" at 4325,390 h30
P7: Top Overlay "ADIO16" at 778,1717 h60 r90; Top Overlay "ADIO17" at 881,1718 h60 r90; Top Overlay "ADIO18" at 979,1718 h60 r90; Top Overlay "ADIO19" at 1080,1719 h60 r90; Top Overlay "ADIO20" at 1179,1713 h60 r90; Top Overlay "ADIO21" at 1281,1728 h60 r90
P8: Top Overlay "2" at 3745,1125 h50 r270; Top Overlay "1" at 3645,1105 h50 r270; Top Overlay "9" at 3645,565 h50 r270; Top Overlay "10" at 3745,565 h50 r270
P9: Top Overlay "2" at 3245,1125 h50 r270; Top Overlay "1" at 3145,1105 h50 r270; Top Overlay "9" at 3145,565 h50 r270; Top Overlay "10" at 3245,565 h50 r270
P10: Top Overlay "2" at 2745,1125 h50 r270; Top Overlay "1" at 2645,1105 h50 r270; Top Overlay "9" at 2645,565 h50 r270; Top Overlay "10" at 2745,565 h50 r270